# Altium PCB testboard_chip1_poling.PcbDoc
Units mm, origin at the board's own origin, x right, y up, seen from the top; angles counter-clockwise.
Board outline 111 x 73.02 mm, 2 copper layers (Top Layer, Bottom Layer); 23 components, 11 nets, 166 pads, 1 vias.
Unrouted connection lines stored in the file: 73.
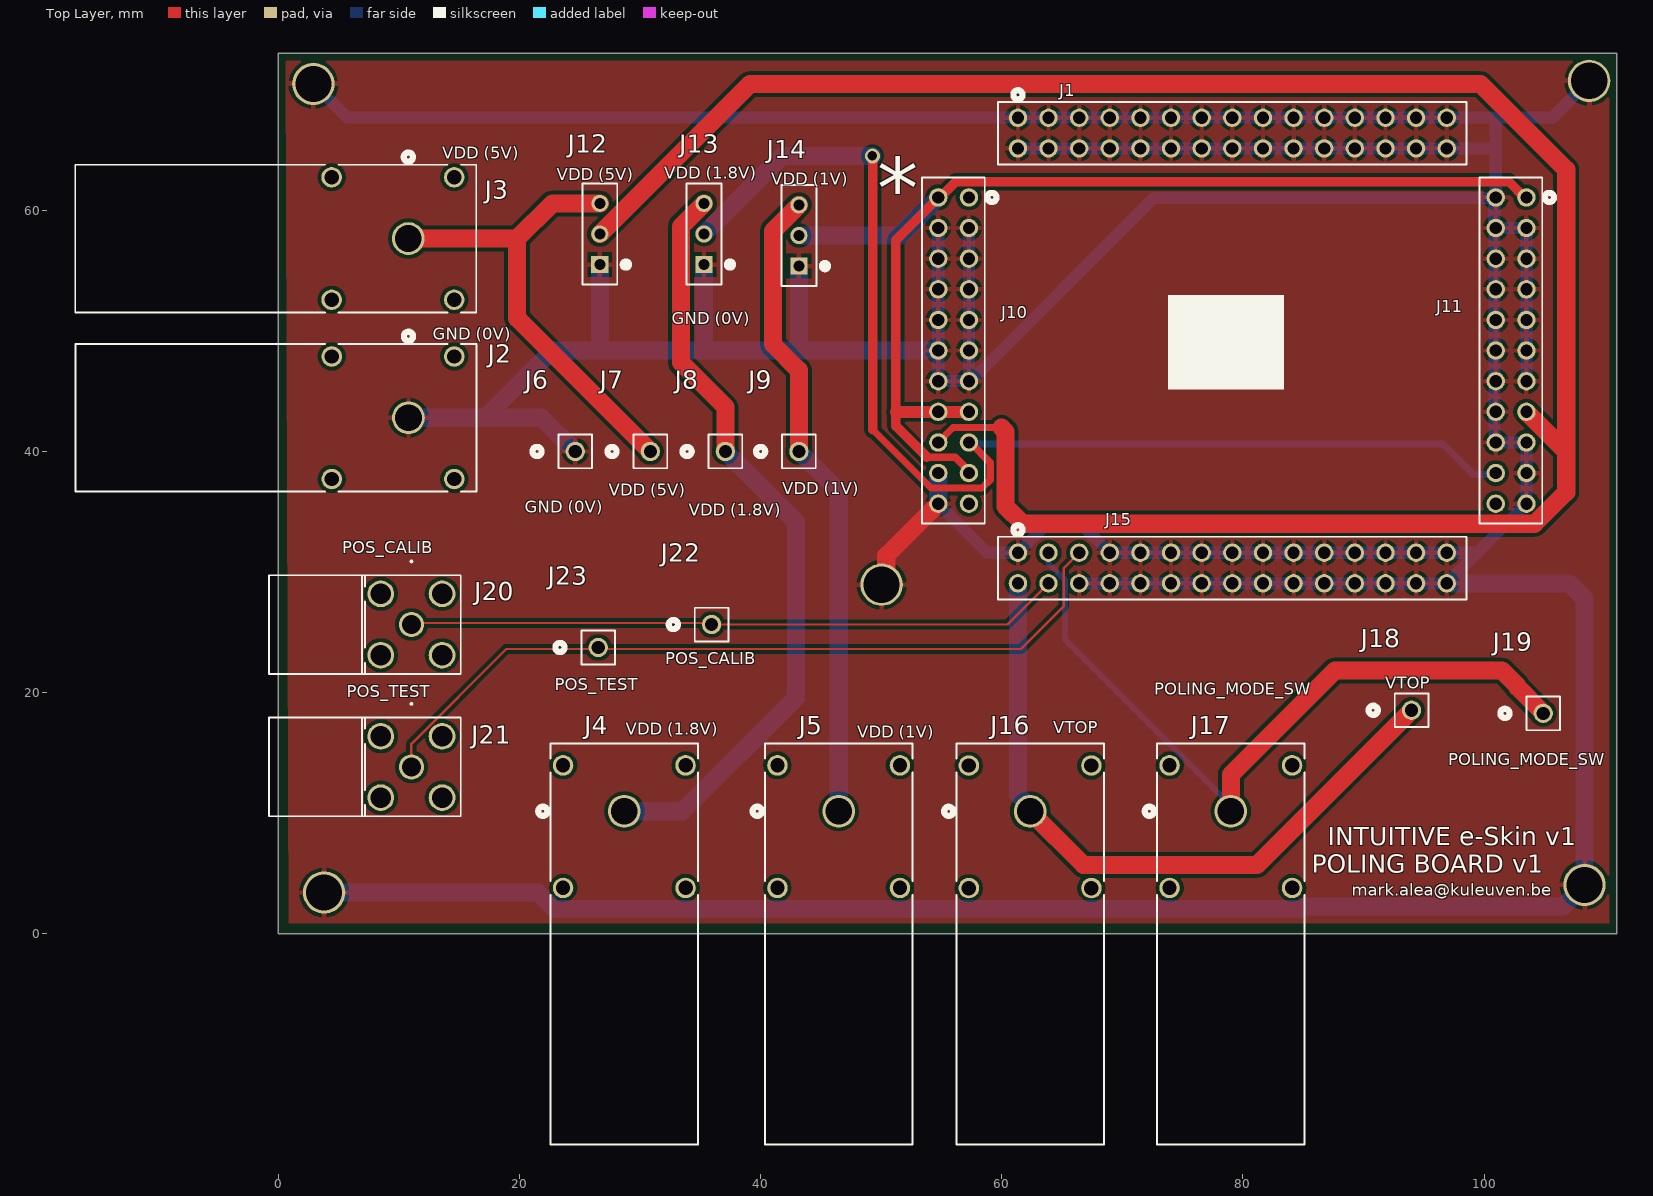
[diagram p0: Top Layer view]
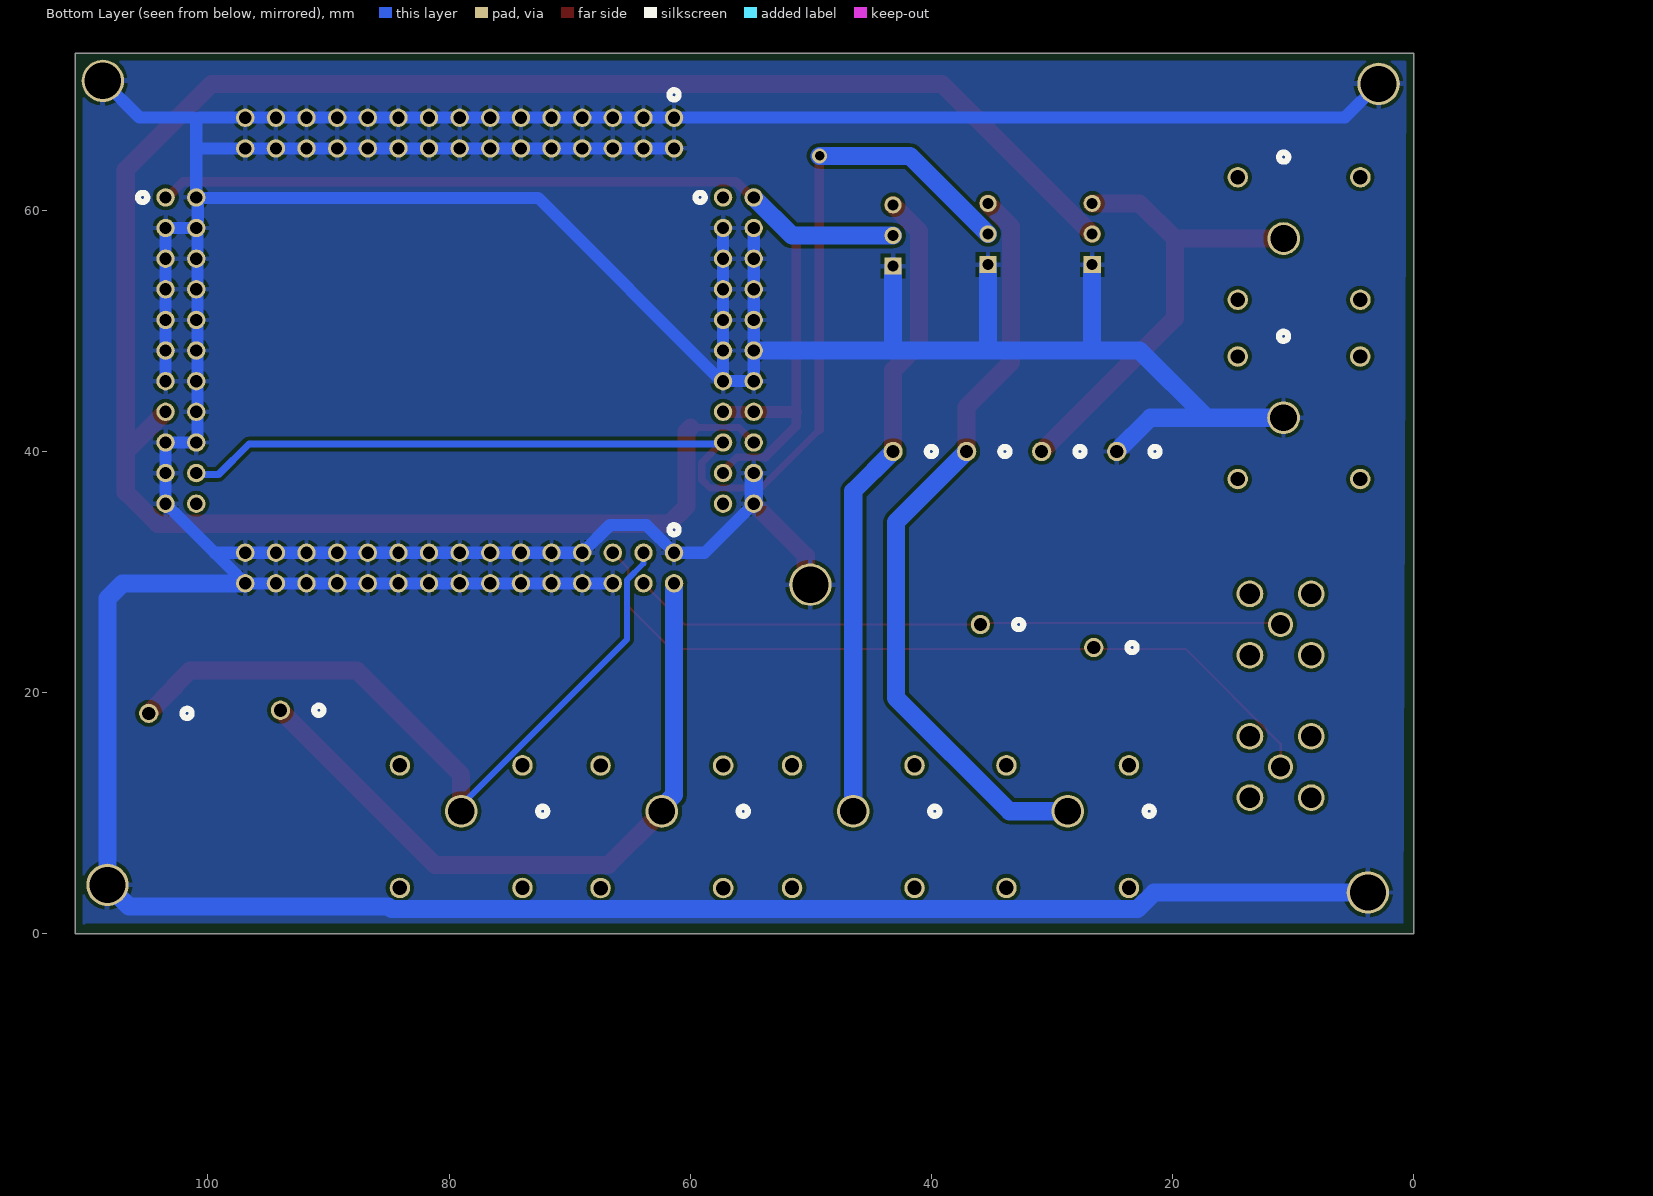
[diagram p1: Bottom Layer view, seen from below]

## Layer stack, top to bottom
Top Solder: solder mask 0.0102, Solder Resist, Dk 3.5
Top Layer: signal copper 0.0356
Dielectric 1: dielectric 0.32, FR-4, Dk 4.8
Bottom Layer: signal copper 0.0356
Bottom Solder: solder mask 0.0102, Solder Resist, Dk 3.5

## Board outline
0,0 110.998,0 110.998,73.025 0,73.025

## Design rules (kind name [scope] priority, off if disabled: settings)
BoardOutlineClearance [All] p1: gap=0.25 ignorepadtopadclearanceinfootprint=FALSE except(0: Arc-SplitContinuation Track-SplitContinuation SMDPad-SplitContinuation THPad-SplitContinuation Via-SplitContinuation Fill-SplitContinuation Poly-SplitContinuation Region-SplitContinuation Text-SplitContinuation)
Clearance Clearance-xPP-xTP-xTT [All] p1: gap=0.15 ignorepadtopadclearanceinfootprint=FALSE except(0: Arc-Hole Track-Hole SMDPad-Hole THPad-Hole Via-Hole Fill-Hole Poly-Hole Region-Hole Text-Hole)
ComponentClearance [All] p1: gap=0.25 collisioncheckmode=3 verticalgap=0.25 showdistances=FALSE
DiffPairsRouting [All] p1: maxlimit=0.25 minlimit=0.25 mostfreqgap=0.25 toplayer_minwidth=0.381 toplayer_maxwidth=0.381 toplayer_prefwidth=0.381 bottomlayer_minwidth=0.381 bottomlayer_maxwidth=0.381 bottomlayer_prefwidth=0.381 maxuncoupledlength=12.5
Height [All] p1: minheight=0 maxheight=25 prefheight=12.5
HoleSize HoleSize-PTH [All] p1: absolutevalues=TRUE maxlimit=2 minlimit=0.25 maxpercent=80.000 minpercent=20.000
HoleToHoleClearance [All] p1: gap=0.35 allowstackedmicrovias=TRUE
MinimumAnnularRing "Minimum IAR  >0.45mm" [((ObjectKind = 'Pad') OR (ObjectKind = 'Via')) And (Layer = 'MultiLayer') And (HoleDiameter > AsMM(0.45))] p1: minimumring=0.175 // minimum inner annular ring for pads > 0.45mm finished hole size
MinimumAnnularRing "Minimum IAR <=0.45mm" [((ObjectKind = 'Pad') OR (ObjectKind = 'Via')) And (Layer = 'MultiLayer') And (HoleDiameter <= AsMM(0.45))] p2: minimumring=0.175 // minimum inner annular ring for pads <= 0.45mm finished hole size
MinimumSolderMaskSliver [All] p1: minsoldermaskwidth=0.08
PlaneClearance PlaneClearance-IPI [All] p1: clearance=0.25
PlaneConnect [All] p1: planeconnectstyle=Relief reliefexpansion=0.175 reliefentries=4 reliefconductorwidth=0.2 reliefairgap=0.2
PolygonConnect PolygonConnect-xTW [All] p1: connectstyle=Relief reliefconductorwidth=0.2 reliefentries=4 polygonreliefangle="90 Angle" airgapwidth=0.2
RoutingCorners [All] p1: cornerstyle=45-Degree minsetback=2.5 maxsetback=2.5
RoutingVias "RoutingVias > 0.45mm" [(ObjectKind = 'Via') And (HoleDiameter > AsMM(0.45))] p1: holewidth=0.5 width=0.85 viastyle="Through Hole" minholewidth=0.5 minwidth=0.85 maxholewidth=0.9 maxwidth=1.25 // finishet hole size > 0.45mm
RoutingVias "RoutingVias <= 0.45mm" [(ObjectKind = 'Via') And (HoleDiameter <= AsMM(0.45))] p2: holewidth=0.3 width=0.65 viastyle="Through Hole" minholewidth=0.25 minwidth=0.6 maxholewidth=0.45 maxwidth=0.8 // finishet hole size <= 0.45mm
SilkToSilkClearance [All] p1: silktosilkclearance=0.2
SilkToSolderMaskClearance SilkscreenOverComponentPads [IsPad] p1: minsilkscreentomaskgap=0.2 clearancetoexposedcopper=TRUE
SolderMaskExpansion [All] p1: expansion=0
UnRoutedNet [All] p1: checkbadconnections=TRUE
Width Width-xTW [All] p1: maxlimit=1.5 minlimit=0.15 preferedwidth=0.2
18 further rules are at their usual default settings.

## Components (designator, comment, footprint, x,y, rotation, side; value= is the part's Value field where it differs from the comment)
J1 "SSW-115-01-T-D" CON30_2X15_TU_SSQ 79.121,66.405 r180 top
J2 "FCR7350B" CONN1_FCR7350R_CLF 10.805,42.799 r270 top
J3 "FCR7350R" CONN1_FCR7350R_CLF 10.795,57.658 r270 top
J4 "FCR7350R" CONN1_FCR7350R_CLF 28.702,10.17 r0 top
J5 "FCR7350R" CONN1_FCR7350R_CLF 46.482,10.17 r0 top
J6 "901200761" CONN_90120-0761_MOL 24.638,40.005 r0 top
J7 "901200761" CONN_90120-0761_MOL 30.861,40.005 r0 top
J8 "901200761" CONN_90120-0761_MOL 37.084,40.005 r0 top
J9 "901200761" CONN_90120-0761_MOL 43.18,40.005 r0 top
J10 "SSW-111-01-G-D" CON23_2X11_TU_SSQ 56.007,48.371 r90 top
J11 "SSW-111-01-G-D" CON23_2X11_TU_SSQ 102.235,48.371 r90 top
J12 "M20-9990345" CONN_M20-99903XX_HRW 26.67,55.499 r90 top
J13 "M20-9990345" CONN_M20-99903XX_HRW 35.306,55.499 r90 top
J14 "M20-9990345" CONN_M20-99903XX_HRW 43.18,55.372 r90 top
J15 "SSW-115-01-T-D" CON30_2X15_TU_SSQ 79.121,30.337 r180 top
J16 "FCR7350R" CONN1_FCR7350R_CLF 62.357,10.16 r0 top
J17 "FCR7350R" CONN1_FCR7350R_CLF 78.994,10.17 r0 top
J18 "901200761" CONN_90120-0761_MOL 93.98,18.542 r0 top
J19 "901200761" CONN_90120-0761_MOL 104.902,18.288 r0 top
J20 "142-0701-301" CONN_142-0701-301_CIN 11.049,25.654 r90 top
J21 "142-0701-301" CONN_142-0701-301_CIN 11.049,13.843 r90 top
J22 "901200761" CONN_90120-0761_MOL 35.941,25.654 r0 top
J23 "901200761" CONN_90120-0761_MOL 26.543,23.749 r0 top

## Footprints (in the part's own frame and the unit in brackets; to place one, negate y for a bottom-side part, rotate by r counter-clockwise, add the part's x,y. Pads: shape width x height; smd on the part's side, far side on the other; paste and mask are expansions set on the pad)
CON23_2X11_TU_SSQ [mil]
  round 60 hole 40 mask+0: 1(500,-50) 2(500,50) 3(400,-50) 4(400,50) 5(300,-50) 6(300,50) 7(200,-50) 8(200,50) 9(100,-50) 10(100,50) 11(0,-50) 12(0,50) 13(-100,-50) 14(-100,50) 15(-200,-50) 16(-200,50) 17(-300,-50) 18(-300,50) 19(-400,-50) 20(-400,50) 21(-500,-50) 22(-500,50)
  silkscreen extent -565,-140 565,103, body extent 0,0 10,10, height 10
CON30_2X15_TU_SSQ [mil]
  round 60 hole 40 mask+0: 1(700,-50) 2(700,50) 3(600,-50) 4(600,50) 5(500,-50) 6(500,50) 7(400,-50) 8(400,50) 9(300,-50) 10(300,50) 11(200,-50) 12(200,50) 13(100,-50) 14(100,50) 15(0,-50) 16(0,50) 17(-100,-50) 18(-100,50) 19(-200,-50) 20(-200,50) 21(-300,-50) 22(-300,50) 23(-400,-50) 24(-400,50) 25(-500,-50) 26(-500,50) 27(-600,-50) 28(-600,50) 29(-700,-50) 30(-700,50)
  silkscreen extent -765,-140 765,103, body extent 0,0 10,10, height 10
CONN1_FCR7350R_CLF [mil]
  round 107 hole 87 mask+0: 1(0,0)
  round 67 hole 47: 2(-200,149.61) 3(200,149.61) 4(-200,-250.39) 5(200,-250.39)
  silkscreen extent -281,-1087 241,222, body extent 0,0 10,10, height 10
CONN_142-0701-301_CIN [mil]
  round 82 hole 62 mask+0: 1(0,0)
  round 87 hole 67 mask+0: 2(-100,100) 3(-100,-100) 4(100,-100) 5(100,100)
  silkscreen extent -161,-161 209,465, body extent 0,0 10,10, height 10
CONN_90120-0761_MOL [mil]
  round 63 hole 43 mask+0: 1(0,0)
  silkscreen extent -140,-55 55,55, body extent 0,0 10,10, height 10
CONN_M20-99903XX_HRW [mil]
  rect 56x56 hole 36 mask+0: 1(0,0)
  round 56 hole 36 mask+0: 2(100,0) 3(200,0)
  silkscreen extent -65,-95 265,57, body extent -50,-13 250,13, height 344

## Part data
J1 J10 J11 J15: "No Description Available", Mfr_Name="Samtec Inc", Copyright="Copyright (C) 2022 Ultra Librarian. All rights reserved.", RefDes=RefDes, Type=DEV
  J1 J15: Manufacturer_Part_Number=SSW-115-01-T-D
  J10 J11: Manufacturer_Part_Number=SSW-111-01-G-D
J2: library part FCR7350R, "No Description Available", Mfr_Name=Cliff, Copyright="Copyright (C) 2022 Ultra Librarian. All rights reserved.", Manufacturer_Part_Number=FCR7350R, RefDes=RefDes, Type=DEV
J3 J4 J5 J16 J17: "No Description Available", Mfr_Name=Cliff, Copyright="Copyright (C) 2022 Ultra Librarian. All rights reserved.", Manufacturer_Part_Number=FCR7350R, RefDes=RefDes, Type=DEV
J6 J7 J8 J9 J18 J19 J22 J23: "No Description Available", Mfr_Name="Molex Connector Corporation", Copyright="Copyright (C) 2022 Ultra Librarian. All rights reserved.", Manufacturer_Part_Number=901200761, RefDes=RefDes, Type=DEV
J12 J13 J14: "No Description Available", Mfr_Name=Harwin, Copyright="Copyright (C) 2022 Ultra Librarian. All rights reserved.", Manufacturer_Part_Number=M20-9990345, RefDes=RefDes, Type=DEV
J20 J21: "No Description Available", Mfr_Name="Cinch Connectivity Solutions", Copyright="Copyright (C) 2022 Ultra Librarian. All rights reserved.", Manufacturer_Part_Number=142-0701-301, RefDes=RefDes, Type=DEV

## Free pads (board coordinates)
  round 3.508 hole 3 mask+0: 1(2.921,70.485) 1(50.038,28.956) 2(108.712,70.739) 3(3.81,3.429) 4(108.331,4.064)

## Via types
v1: diameter 1.25, hole 0.8, Top Layer to Bottom Layer, 1 vias

## Nets (pads, with @x,y where several pads share a name; then routed paths per layer and width w, separated by ;. In a path a pad name is that pad's centre, name@x,y a point inside that pad or via, vN(x,y) a via of type N, cw(c..) or ccw(c..) an arc to the next point about the centre after c; other vN are vias at no path point)
GND: J1.1 J1.2 J1.3 J1.4 J1.5 J1.6 J1.7 J1.8 J1.9 J1.10 J1.11 J1.12 J1.13 J1.14 J1.15 J1.16 J1.17 J1.18 J1.19 J1.20 J1.21 J1.22 J1.23 J1.24 J1.25 J1.26 J1.27 J1.28 J1.29 J1.30 J2.1 J6.1 J10.3 J10.4 J10.5 J10.6 J10.7 J10.8 J10.9 J10.10 J10.11 J10.12 J10.13 J10.14 J10.20 J10.22 J11.2 J11.3 J11.4 J11.5 J11.6 J11.7 J11.8 J11.9 J11.10 J11.11 J11.12 J11.13 J11.14 J11.16 J11.17 J11.18 J11.19 J11.21 J12.1 J13.1 J14.1 J15.1 J15.6 J15.7 J15.8 J15.9 J15.10 J15.11 J15.12 J15.13 J15.14 J15.15 J15.16 J15.17 J15.18 J15.19 J15.20 J15.21 J15.22 J15.23 J15.24 J15.25 J15.26 J15.27 J15.28 J15.29 J15.30 pad.1 pad.2 pad.3 pad.4 | length 592.6
  Top Layer w1.5: pad.1@50.038,28.956 50.422,29.34 50.422,31.356 J10.22
  Bottom Layer w1: pad.1@2.921,70.485 5.715,67.691 61.341,67.691 63.881,67.691 66.421,67.691 68.961,67.691 71.501,67.691 74.041,67.691 76.581,67.691 79.121,67.691 81.661,67.691 84.201,67.691 86.741,67.691 89.281,67.691 91.821,67.691 94.361,67.691 96.901,67.691 100.711,67.691 100.965,67.437 ; J10.22 58.801,31.607 J15.1 63.643,33.909 66.659,33.909 J15.7 J15.9 J15.11 J15.13 J15.15 J15.17 J15.19 J15.21 J15.23 J15.25 J15.27 J15.29 99.441,31.607 ; J10.4 J10.6 J10.8 J10.10 J10.12 J10.14 J10.13 J10.11 J10.9 J10.7 J10.5 J10.3 ; J10.13@57.377,45.798 72.617,61.038 J11.2@101.065,61.038 ; J1.2 J1.4 J1.6 J1.8 J1.10 J1.12 J1.14 J1.16 J1.18 J1.20 J1.22 J1.24 J1.26 J1.28 J1.30 100.822,65.135 100.965,65.278 ; J15.6 J15.8 J15.10 J15.12 J15.14 J15.16 J15.18 J15.20 J15.22 J15.24 J15.26 J15.28 J15.30 99.441,31.607 ; J11.4@100.838,58.459 J11.2@100.838,60.999 ; J11.4@100.867,58.474 100.867,55.991 100.867,53.451 100.867,50.911 100.867,48.371 100.867,45.831 100.867,43.291 100.867,40.849 J11.18 J11.17 J11.19 J11.21 99.441,31.607 ; J11.4 J11.3 J11.5 J11.7 J11.9 J11.11 J11.13 ; J11.2 100.965,65.278 ; pad.2 105.664,67.691 101.219,67.691 100.965,67.437 ; 100.965,65.278 100.965,67.437
  Bottom Layer w1.5: pad.3 21.527,3.429 22.907,2.049 84.789,2.049 85.026,2.286 106.553,2.286 pad.4 108.331,27.813 107.077,29.067 J15.30 ; J2.1 17.145,42.799 ; J6.1 21.844,42.799 17.145,42.799 ; J12.1 26.67,48.387 ; J13.1 35.306,48.387 ; J14.1 43.18,48.387 ; J10.22 J10.20 ; J10.12@54.737,48.387 43.18,48.387 ; 17.145,42.799 22.733,48.387 26.67,48.387 ; 26.67,48.387 35.306,48.387 ; 35.306,48.387 43.18,48.387
POLING_MODE_SW: J15.3 J17.1 J19.1 | length 61.8
  Top Layer w1.5: J17.1 78.994,13.217 87.621,21.844 101.473,21.844 102.762,20.555 102.762,20.456 104.902,18.315 J19.1
  Bottom Layer w0.2: J17.1 J17.1@78.994,10.447
  Bottom Layer w0.5: J15.3 63.881,30.71 65.259,29.332 65.259,24.394 78.994,10.659 J17.1@78.994,10.447
POS_CALIB: J15.4 J20.1 J22.1 | length 54.7
  Top Layer w0.2: J20.1@11.049,25.781 35.687,25.781 35.941,26.035 J22.1 60.468,25.654 J15.4
POS_TEST: J15.5 J21.1 J23.1 | length 65.7
  Top Layer w0.2: J21.1 11.049,15.759 18.912,23.622 61.595,23.622 65.151,27.178 65.151,30.337 J15.5
VDD_1P8V: J4.1 J8.1 J13.3 | length 63.9
  Top Layer w1.5: J13.3 33.401,58.674 33.401,47.371 37.084,43.688 J8.1
  Bottom Layer w1.5: J4.1 33.538,10.17 42.926,19.558 42.926,34.163 J8.1
VDD_1P8V_SEL: J10.17 J11.20 J13.2 | length 99.8
  Top Layer w0.6: 49.372,41.74 54.139,36.972 58.361,36.972 59.055,37.666 59.055,39.073 J10.17@57.404,40.724
  Top Layer w0.8: 49.317,41.794 v1@49.317,64.516
  Bottom Layer w0.6: J10.17@56.847,40.624 96.598,40.624 99.138,38.084 J11.20@100.535,38.084
  Bottom Layer w1.5: J13.2 41.783,64.516 v1(49.276,64.516)
VDD_1V: J5.1 J9.1 J14.3 | length 53.4
  Top Layer w1.5: J9.1 43.18,46.736 41.021,48.895 41.021,58.293 J14.3
  Bottom Layer w1.5: J9.1 46.482,36.703 J5.1
VDD_1V_SEL: J10.2 J10.15 J10.16 J10.19 J11.1 J14.2 | length 96.9
  Top Layer w0.6: 53.795,39.534 56.139,39.534 J10.19@57.351,38.322
  Top Layer w0.8: 53.795,39.534 51.214,42.115 51.214,57.548 J10.2 54.888,61.071 56.2,62.383 102.042,62.383 103.354,61.071 J11.1
  Top Layer w1: 51.23,43.291 J10.16 J10.15
  Bottom Layer w1.5: J14.2 51.578,57.912 J10.2
VDDPST: J3.1 J7.1 J12.3 | length 39.3
  Top Layer w1.5: J3.1 19.812,57.658 ; J12.3 22.733,60.579 19.812,57.658 ; J7.1 19.812,51.054 19.812,57.658
VDDPST_SEL: J10.18 J11.15 J12.2 | length 180.3
  Top Layer w0.6: J10.18 55.968,41.982 59.978,41.982
  Top Layer w1.5: J12.2 39.116,70.485 99.695,70.485 106.807,63.373 106.807,39.989 ; 59.978,41.982 60.325,41.635 60.325,35.433 61.749,34.009 104.193,34.009 106.807,36.623 106.807,39.989 ; J11.15 106.807,39.989
VTOP: J15.2 J16.1 J18.1 | length 58.1
  Top Layer w1.5: J16.1 66.802,5.715 81.153,5.715 J18.1
  Bottom Layer w1.5: J15.2 61.341,11.506 62.357,10.49 J16.1
pads on no net: J2.2 J2.3 J2.4 J2.5 J3.2 J3.3 J3.4 J3.5 J4.2 J4.3 J4.4 J4.5 J5.2 J5.3 J5.4 J5.5 J10.1 J10.21 J11.22 J16.2 J16.3 J16.4 J16.5 J17.2 J17.3 J17.4 J17.5 J20.2 J20.3 J20.4 J20.5 J21.2 J21.3 J21.4 J21.5

## Polygon pours and split planes (outlines as drawn)
GND on Bottom Layer (solid, pour order 4): 0.635,72.39 110.363,72.39 110.363,0.635 110.109,0.889 0.889,0.889
GND on Top Layer (solid, pour order 6): 0.635,72.39 110.363,72.39 110.363,0.889 0.889,0.889

## Silkscreen, mask and mechanical layers (free items; w line width, h text height)
Top Overlay:
  region: 73.821,45.151 83.405,45.151 83.405,52.943 73.821,52.943
  text "VDD (5V)" at 13.589,64.262 h1
  text "VDD (1.8V)" at 32.004,62.611 h1
  text "VDD (5V)" at 23.114,62.484 h1
  text "VDD (1V)" at 40.894,62.103 h1
  text "*" at 49.657,59.436 h5
  text "GND (0V)" at 32.639,50.546 h1
  text "GND (0V)" at 12.827,49.276 h1
  text "VDD (1V)" at 41.783,36.449 h1
  text "VDD (5V)" at 27.432,36.322 h1
  text "GND (0V)" at 20.447,34.925 h1
  text "VDD (1.8V)" at 34.036,34.671 h1
  text "POS_CALIB" at 5.307,31.548 h1
  text "POS_CALIB" at 32.115,22.352 h1
  text "VTOP" at 91.821,20.32 h1
  text "POS_TEST" at 22.922,20.193 h1
  text "POLING_MODE_SW" at 72.644,19.812 h1
  text "POS_TEST" at 5.688,19.61 h1
  text "VTOP" at 64.262,16.637 h1
  text "VDD (1.8V)" at 28.829,16.51 h1
  text "VDD (1V)" at 48.006,16.256 h1
  text "POLING_MODE_SW" at 97.028,13.97 h1
  text "INTUITIVE e-Skin v1" at 87.014,7.366 h1.52
  text "POLING BOARD v1" at 85.725,5.08 h1.52
  text "mark.alea@kuleuven.be" at 89.027,3.175 h1